# Altium PCB BOARD.PcbDoc
Units mil, origin at the board's own origin, x right, y up, seen from the top; angles counter-clockwise.
Board outline 615 x 1965 mil, 4 copper layers (Component Side, Signal Layer 1, Signal Layer 2, Solder Side), stack 62.2 mil thick; 60 components, 39 nets, 168 pads, 33 vias.
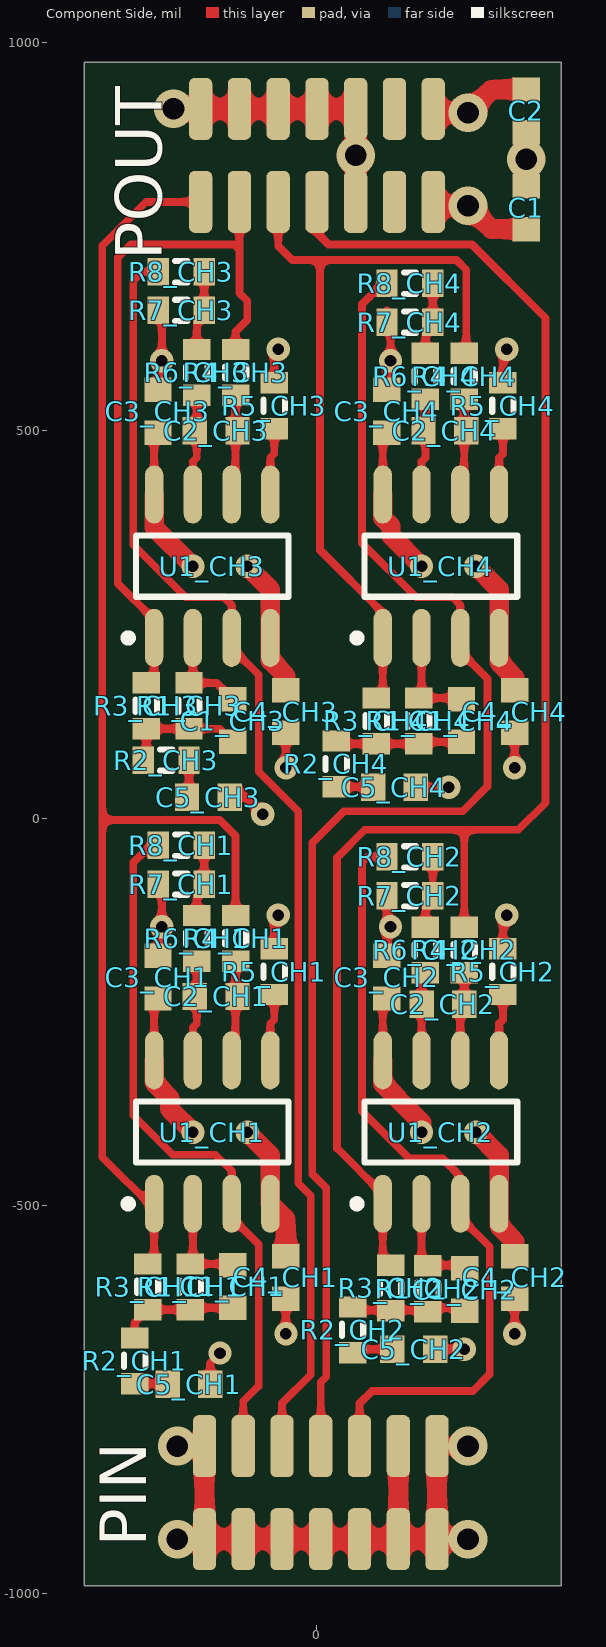
[diagram p0: Component Side view]
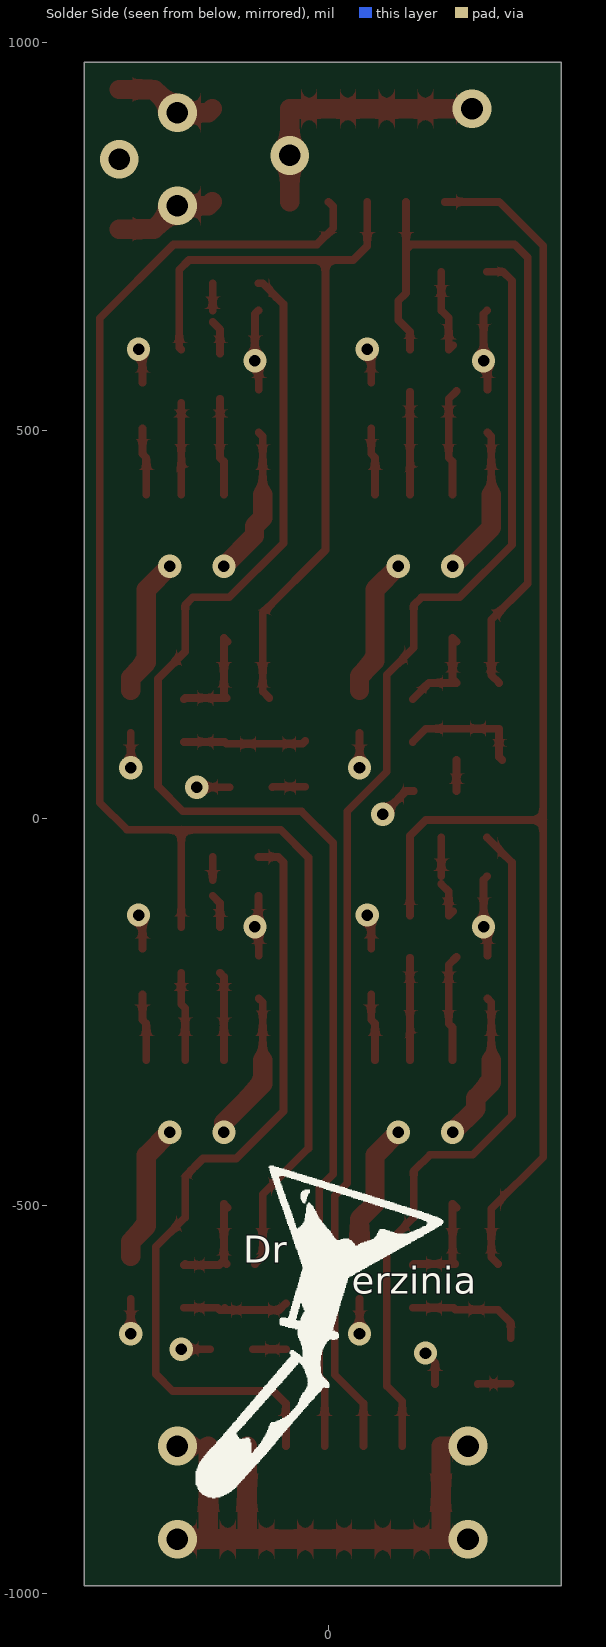
[diagram p1: Solder Side view, seen from below]
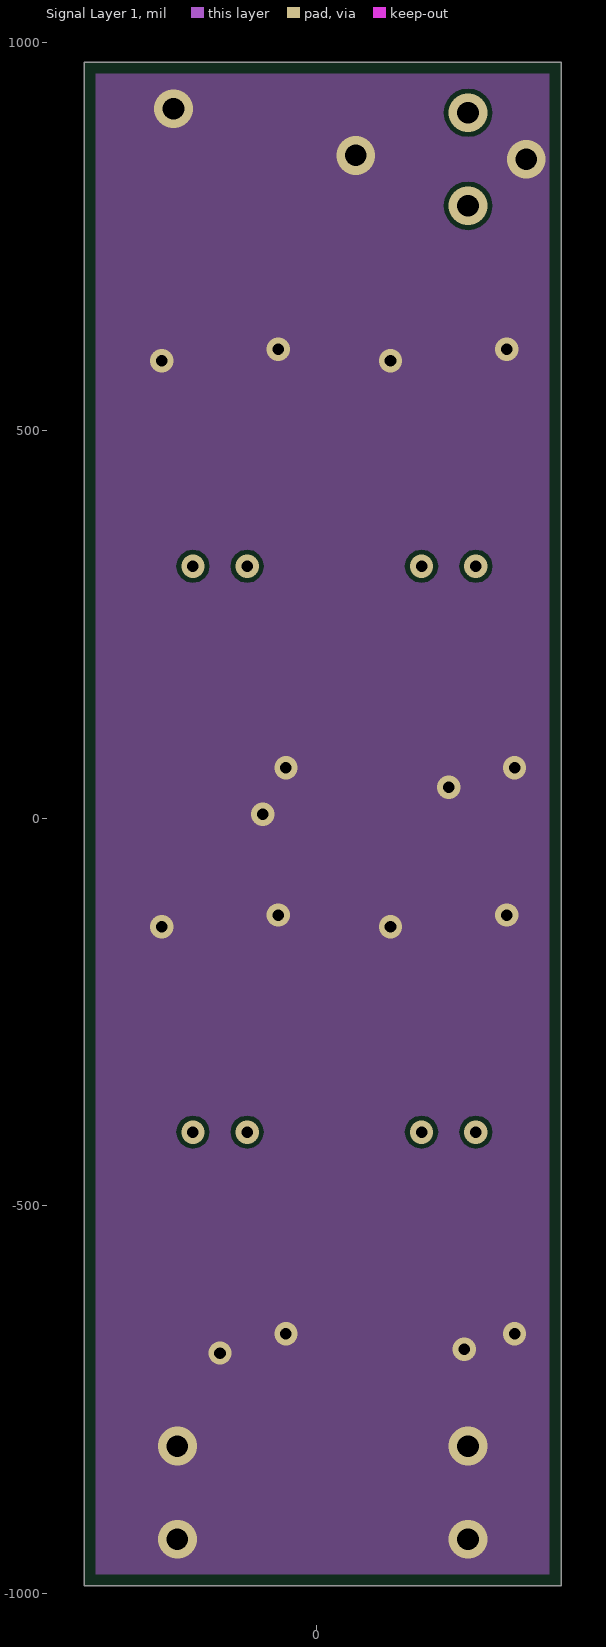
[diagram p2: Signal Layer 1]
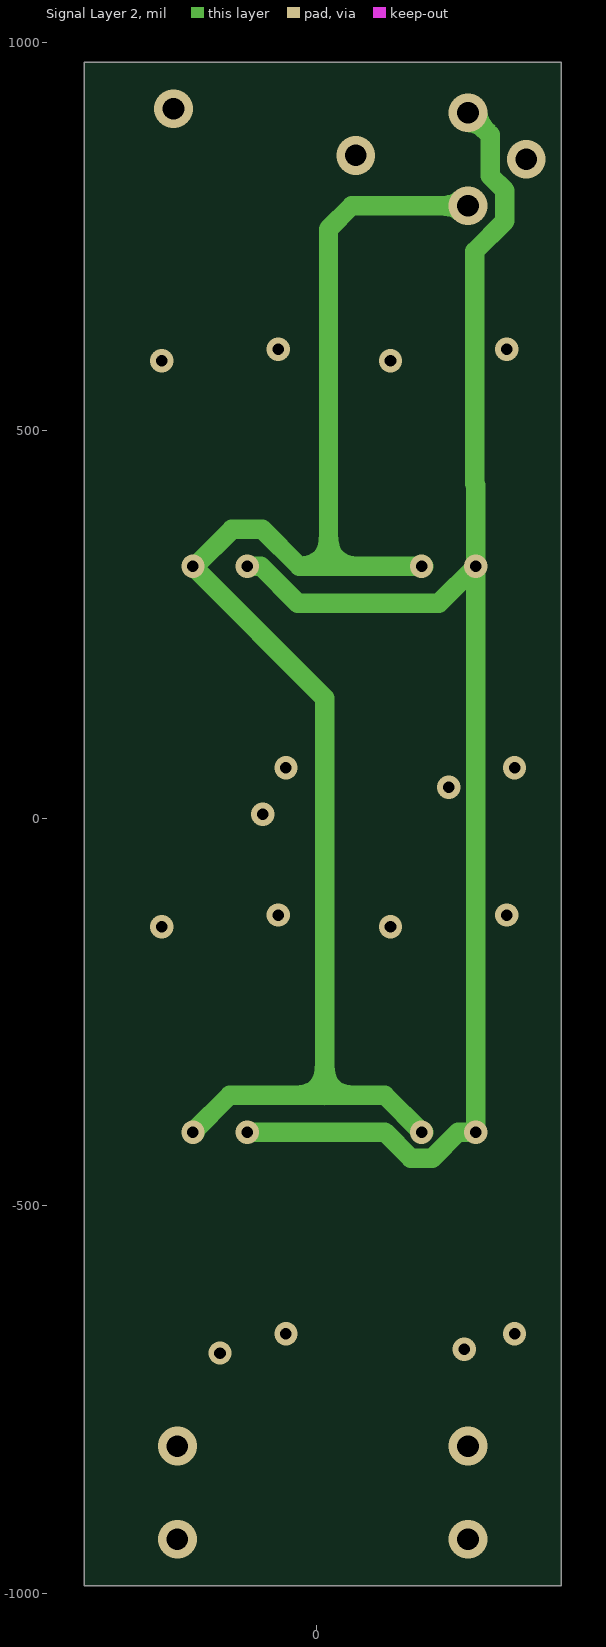
[diagram p3: Signal Layer 2]

## Layer stack, top to bottom
Top Solder: solder mask 0.4, Solder Resist, Dk 3.5
Component Side: signal copper 1.4
Dielectric 1: core 7, FR-4, Dk 4.8
Signal Layer 1: signal copper 0.7
Dielectric 3: prepreg 44, Dk 4.2
Signal Layer 2: signal copper 0.7
Dielectric 4: core 7, Dk 4.2
Solder Side: signal copper 1.4
Bottom Solder: solder mask 0.4, Solder Resist, Dk 3.5

## Board outline
-300,-990 -300,975 315,975 315,-990

## Design rules (kind name [scope] priority, off if disabled: settings)
Clearance [All] p1: gap=6 ignorepadtopadclearanceinfootprint=FALSE except(0: Arc-Hole Track-Hole SMDPad-Hole THPad-Hole Via-Hole Fill-Hole Poly-Hole Region-Hole Text-Hole)
PolygonConnect [All] p1: connectstyle=Direct reliefconductorwidth=10 reliefentries=4 polygonreliefangle="90 Angle" airgapwidth=10
RoutingVias [All] p1: holewidth=28 width=50 viastyle="Through Hole" minholewidth=10 minwidth=20 maxholewidth=28 maxwidth=50
SolderMaskExpansion [All] p1: expansion=4
Width [All] p1: maxlimit=30 minlimit=10 preferedwidth=30 toplayer_prefwidth=10 midlayer1_prefwidth=10 bottomlayer_prefwidth=10 minimp=50.000000 maximp=50.000000 favimp=50.000000
30 further rules are at their usual default settings.

## Classes and differential pairs
channel class CHANNEL: CH1 CH2 CH3 CH4
net class OUT[1..4]: OUT1 OUT2 OUT3 OUT4
net class IN[1..4]: IN1 IN2 IN3 IN4
component class U_CONNECTORS: PIN POUT
component class CH4: C1_CH4 C2_CH4 C3_CH4 C4_CH4 C5_CH4 R1_CH4 R2_CH4 R3_CH4 R4_CH4 R5_CH4 R6_CH4 R7_CH4 R8_CH4 U1_CH4
component class CH3: C1_CH3 C2_CH3 C3_CH3 C4_CH3 C5_CH3 R1_CH3 R2_CH3 R3_CH3 R4_CH3 R5_CH3 R6_CH3 R7_CH3 R8_CH3 U1_CH3
component class CH2: C1_CH2 C2_CH2 C3_CH2 C4_CH2 C5_CH2 R1_CH2 R2_CH2 R3_CH2 R4_CH2 R5_CH2 R6_CH2 R7_CH2 R8_CH2 U1_CH2
component class CH1: C1_CH1 C2_CH1 C3_CH1 C4_CH1 C5_CH1 R1_CH1 R2_CH1 R3_CH1 R4_CH1 R5_CH1 R6_CH1 R7_CH1 R8_CH1 U1_CH1
component class BOARD: C1 C2

## Components (designator, comment, footprint, x,y, rotation, side; value= is the part's Value field where it differs from the comment)
C1 "Cap Semi" 1608[0603] 270,787.44 r270 top value=10uF
C1_CH1 "Cap Semi" 1608[0603] -108.5,-604.06 r90 top value=2000pF (schematic designator C1)
C1_CH2 "Cap Semi" 1608[0603] 191,-608 r90 top value=2000pF (schematic designator C1)
C1_CH3 "Cap Semi" 1608[0603] -108.5,125.94 r90 top value=2000pF (schematic designator C1)
C1_CH4 "Cap Semi" 1608[0603] 186.5,125.94 r90 top value=2000pF (schematic designator C1)
C2 "Cap Semi" 1608[0603] 270,912.44 r90 top value=10uF
C2_CH1 "Cap Semi" 1608[0603] -130,-230 r0 top value=470pF (schematic designator C2)
C2_CH2 "Cap Semi" 1608[0603] 162.56,-240 r0 top value=470pF (schematic designator C2)
C2_CH3 "Cap Semi" 1608[0603] -130,500 r0 top value=470pF (schematic designator C2)
C2_CH4 "Cap Semi" 1608[0603] 165,500 r0 top value=470pF (schematic designator C2)
C3_CH1 "Cap Semi" 1608[0603] -205,-205 r270 top value=100nF (schematic designator C3)
C3_CH2 "Cap Semi" 1608[0603] 90,-205 r270 top value=100nF (schematic designator C3)
C3_CH3 "Cap Semi" 1608[0603] -205,525 r270 top value=100nF (schematic designator C3)
C3_CH4 "Cap Semi" 1608[0603] 90,525 r270 top value=100nF (schematic designator C3)
C4_CH1 "Cap Semi" 1608[0603] -40,-592.44 r90 top value=100nF (schematic designator C4)
C4_CH2 "Cap Semi" 1608[0603] 255,-592.44 r90 top value=100nF (schematic designator C4)
C4_CH3 "Cap Semi" 1608[0603] -40,137.56 r90 top value=100nF (schematic designator C4)
C4_CH4 "Cap Semi" 1608[0603] 255,137.56 r90 top value=100nF (schematic designator C4)
C5_CH1 "Cap Semi" 1608[0603] -165,-730 r180 top value=47nF (schematic designator C5)
C5_CH2 "Cap Semi" 1608[0603] 125,-685 r180 top value=47nF (schematic designator C5)
C5_CH3 "Cap Semi" 1608[0603] -140,27 r180 top value=47nF (schematic designator C5)
C5_CH4 "Cap Semi" 1608[0603] 100,40 r180 top value=47nF (schematic designator C5)
PIN "Header 7X2" CLP-107-02-L-DH-TR 5,-870 r180 top
POUT "Header 7X2" FTSH-107-01-L-DH 0,855 r180 top
R1_CH1 "Res3" J1-0603 -163.5,-604.53 r90 top value=100M (schematic designator R1)
R1_CH2 "Res3" J1-0603 143,-607 r90 top value=100M (schematic designator R1)
R1_CH3 "Res3" J1-0603 -165,145 r90 top value=100M (schematic designator R1)
R1_CH4 "Res3" J1-0603 131.5,125.47 r90 top value=100M (schematic designator R1)
R2_CH1 "Res3" J1-0603 -235,-700 r90 top value=200 (schematic designator R2)
R2_CH2 "Res3" J1-0603 46,-660 r90 top value=200 (schematic designator R2)
R2_CH3 "Res3" J1-0603 -194.53,75 r180 top value=200 (schematic designator R2)
R2_CH4 "Res3" J1-0603 25,70 r90 top value=200 (schematic designator R2)
R3_CH1 "Res3" J1-0603 -218.5,-604.53 r90 top value=82k (schematic designator R3)
R3_CH2 "Res3" J1-0603 95,-606 r90 top value=82k (schematic designator R3)
R3_CH3 "Res3" J1-0603 -220,145 r90 top value=82k (schematic designator R3)
R3_CH4 "Res3" J1-0603 76.5,125.47 r90 top value=82k (schematic designator R3)
R4_CH1 "Res3" J1-0603 -105,-155 r90 top value=1M (schematic designator R4)
R4_CH2 "Res3" J1-0603 190,-170 r90 top value=1M (schematic designator R4)
R4_CH3 "Res3" J1-0603 -105,575 r90 top value=1M (schematic designator R4)
R4_CH4 "Res3" J1-0603 190,570 r90 top value=1M (schematic designator R4)
R5_CH1 "Res3" J1-0603 -55,-197.91 r90 top value=1M (schematic designator R5)
R5_CH2 "Res3" J1-0603 240,-197.91 r90 top value=1M (schematic designator R5)
R5_CH3 "Res3" J1-0603 -55,532.09 r90 top value=1M (schematic designator R5)
R5_CH4 "Res3" J1-0603 240,532.09 r90 top value=1M (schematic designator R5)
R6_CH1 "Res3" J1-0603 -155,-155 r270 top value=100k (schematic designator R6)
R6_CH2 "Res3" J1-0603 140,-170 r270 top value=100k (schematic designator R6)
R6_CH3 "Res3" J1-0603 -155,575 r270 top value=100k (schematic designator R6)
R6_CH4 "Res3" J1-0603 140,570 r270 top value=100k (schematic designator R6)
R7_CH1 "Res3" J1-0603 -175,-85 r0 top value=1M (schematic designator R7)
R7_CH2 "Res3" J1-0603 120,-100 r0 top value=1M (schematic designator R7)
R7_CH3 "Res3" J1-0603 -175,655 r0 top value=1M (schematic designator R7)
R7_CH4 "Res3" J1-0603 120,640 r0 top value=1M (schematic designator R7)
R8_CH1 "Res3" J1-0603 -175,-35 r180 top value=100M (schematic designator R8)
R8_CH2 "Res3" J1-0603 120,-50 r180 top value=100M (schematic designator R8)
R8_CH3 "Res3" J1-0603 -175,705 r180 top value=100M (schematic designator R8)
R8_CH4 "Res3" J1-0603 120,690 r180 top value=100M (schematic designator R8)
U1_CH1 "LT1113" SO8_L -135,-404.92 r90 top (schematic designator U1)
U1_CH2 "LT1113" SO8_L 160,-404.92 r90 top (schematic designator U1)
U1_CH3 "LT1113" SO8_L -135,325.08 r90 top (schematic designator U1)
U1_CH4 "LT1113" SO8_L 160,325.08 r90 top (schematic designator U1)

## Footprints (in the part's own frame and the unit in brackets; to place one, negate y for a bottom-side part, rotate by r counter-clockwise, add the part's x,y. Pads: shape width x height; smd on the part's side, far side on the other; paste and mask are expansions set on the pad)
1608[0603] [mm] "Chip Capacitor, Body 1.6x0.8mm, IPC High Density"
  rect 0.8x0.9 smd: 1(-0.7,0) 2(0.7,0)
  body extent -0.87,-0.48 0.87,0.48, height 1.3
CLP-107-02-L-DH-TR [mil]
  rrect50% 30x80 smd: 1(150,60) 2(150,-60) 3(100,60) 4(100,-60) 5(50,60) 6(50,-60) 7(0,60) 8(0,-60) 9(-50,60) 10(-50,-60) 11(-100,60) 12(-100,-60) 13(-150,60) 14(-150,-60)
  body extent -184,-90 184,90, height 136
FTSH-107-01-L-DH [mil]
  rrect50% 30x80 smd: 1(150,60) 2(150,-60) 3(100,60) 4(100,-60) 5(50,60) 6(50,-60) 7(0,60) 8(0,-60) 9(-50,60) 10(-50,-60) 11(-100,60) 12(-100,-60) 13(-150,60) 14(-150,-60)
  body extent -175,-344 175,85, height 132
J1-0603 [mm] "Chip Resistor, Body 1.6x0.8mm, IPC High Density"
  rect 0.7x0.9 smd: 1(-0.75,0) 2(0.75,0)
  silkscreen extent -0.2,-0.35 0.2,0.35, body extent -0.85,-0.48 0.85,0.48, height 0.9
SO8_L [mm] "SOIC, 8-Leads, Body 4.9x3.9mm, Pitch 1.27mm, IPC High Density"
  oval 1.9x0.6 smd: 1(-2.35,1.905) 2(-2.35,0.635) 3(-2.35,-0.635) 4(-2.35,-1.905) 5(2.35,-1.905) 6(2.35,-0.635) 7(2.35,0.635) 8(2.35,1.905)
  silkscreen extent -2.47,-2.5 1,2.88, body extent -2,-2.5 2,2.5, height 1.75

## Part data
C1 C1_CH1 C1_CH2 C1_CH3 C1_CH4 C2 C2_CH1 C2_CH2 C2_CH3 C2_CH4 C3_CH1 C3_CH2 C3_CH3 C3_CH4 C4_CH1 C4_CH2 C4_CH3 C4_CH4 C5_CH1 C5_CH2 C5_CH3 C5_CH4: "Capacitor (Semiconductor SIM Model)", LatestRevisionDate=29-May-2009, LatestRevisionNote="IPC-7351 Footprint Added.", PackageDescription="Chip Capacitor", PackageReference=C1206, Published=8-Jun-2000, Publisher="Altium Limited"
PIN POUT: "Header, 7-Pin, Dual row", LatestRevisionDate=17-Jul-2002, LatestRevisionNote="Re-released for DXP Platform.", Publisher="Altium Limited", System=Connector
R1_CH1 R1_CH2 R1_CH3 R1_CH4 R2_CH1 R2_CH2 R2_CH3 R2_CH4 R3_CH1 R3_CH2 R3_CH3 R3_CH4 R4_CH1 R4_CH2 R4_CH3 R4_CH4 R5_CH1 R5_CH2 R5_CH3 R5_CH4 R6_CH1 R6_CH2 R6_CH3 R6_CH4 R7_CH1 R7_CH2 R7_CH3 R7_CH4 R8_CH1 R8_CH2 R8_CH3 R8_CH4: "Resistor", LatestRevisionDate=29-May-2009, LatestRevisionNote="IPC-7351 Footprint Added.", PackageDescription="Chip Resistor", PackageReference=J1-0603, Published=8-Jun-2000, Publisher="Altium Limited"
U1_CH1 U1_CH2 U1_CH3 U1_CH4: "LT1113 Opamp"

## Via types
v1: diameter 30, hole 15, Component Side to Solder Side, 24 vias
v2: diameter 50, hole 28, Component Side to Solder Side, 9 vias

## Nets (pads, with @x,y where several pads share a name; then routed paths per layer and width w, separated by ;. In a path a pad name is that pad's centre, name@x,y a point inside that pad or via, vN(x,y) a via of type N, cw(c..) or ccw(c..) an arc to the next point about the centre after c; other vN are vias at no path point)
5V: C1.2 C3_CH1.2 C3_CH2.2 C3_CH3.2 C3_CH4.2 POUT.13 U1_CH1.8 U1_CH2.8 U1_CH3.8 U1_CH4.8 | length 2995.1
  Component Side w10: U1_CH1.8 -210,-237.56 C3_CH1.2 ; U1_CH3.8 -210,492.44 C3_CH3.2 ; v1(-160,-405) v1@-160,-397.62 ; v1(-160,325) v1@-160,332.38 ; U1_CH2.8 85,-237.56 C3_CH2.2 ; U1_CH4.8 85,492.44 C3_CH4.2 ; v1(135,-405) v1@135,-397.62 ; v1(135,325) v1@135,332.38
  Component Side w25: U1_CH1.8 -210,-341 -190,-361 -190,-375 v1(-160,-405) ; U1_CH3.8 -210,375 v1(-160,325) ; U1_CH2.8 85,-342.67 135,-392.67 v1@135,-397.62 ; U1_CH4.8 85,387.33 95.5,376.83 95.5,364.5 v1(135,325) ; POUT.13 155,790 v2(195,790) 225.12,759.88 C1.2
  Signal Layer 2 w25: v1@-157.18,-405 v1(-160,-405) -112.5,-357.5 10,-357.5 ; v1@137.82,-405 v1(135,-405) 87.5,-357.5 10,-357.5 ; v1@137.82,325 v1(135,325) 15,325 ; v2(195,790) 45,790 15,760 15,325 ; 10,-357.5 10,155 v1(-160,325) -157.18,325 -109.68,372.5 -70.32,372.5 -22.82,325 15,325
-5V: C2.2 C4_CH1.2 C4_CH2.2 C4_CH3.2 C4_CH4.2 POUT.14 U1_CH1.4 U1_CH2.4 U1_CH3.4 U1_CH4.4 | length 2865.3
  Component Side w25: v1(-90,-405) -60,-435 U1_CH1.4 -40,-517.44 C4_CH1.2 ; v1(-90,325) -60,295 U1_CH3.4 -60,203.23 -40,183.23 C4_CH3.2 ; POUT.14 155,910 v2(195,910) 225,940 C2.2 ; v1(205,-405) 235,-435 U1_CH2.4 235,-526 255,-546 C4_CH2.2 ; v1(205,325) 235,295 U1_CH4.4 235,201 255,181 C4_CH4.2
  Signal Layer 2 w25: v1(-90,-405) 87.62,-405 121.12,-438.5 148.88,-438.5 182.38,-405 v1(205,-405) v1(205,325) ; v1(-90,325) -72.32,325 -24.82,277.5 157.5,277.5 v1(205,325) ; v2(195,910) 223.59,881.41 223.59,828.59 242.5,809.68 242.5,770.32 203.59,731.41 203.59,431.09 205,429.68 v1(205,325)
GND: C1.1 C2.1 C3_CH1.1 C3_CH2.1 C3_CH3.1 C3_CH4.1 C4_CH1.1 C4_CH2.1 C4_CH3.1 C4_CH4.1 C5_CH1.1 C5_CH2.1 C5_CH3.1 C5_CH4.1 PIN.1 PIN.2 PIN.3 PIN.5 PIN.7 PIN.9 PIN.11 PIN.12 PIN.13 PIN.14 POUT.2 POUT.4 POUT.6 POUT.8 POUT.9 POUT.10 R5_CH1.2 R5_CH2.2 R5_CH3.2 R5_CH4.2 R7_CH1.1 R7_CH2.1 R7_CH3.1 R7_CH4.1 | length 2104.7
  Component Side w10: C3_CH1.1 -205,-145 v1(-200,-140) -200,-79.53 R7_CH1.1@-204.53,-75 ; C3_CH3.1 -205,585 v1(-200,590) -200,650.47 R7_CH3.1 ; C5_CH1.1 -137.44,-702.44 v1(-125,-690) ; C5_CH3.1@-109.88,35 -100,35 v1(-70,5) ; R5_CH1.2 -55,-130 v1(-50,-125) ; R5_CH3.2 -55,600 v1(-50,605) ; v1(-40,-665) C4_CH1.1 ; v1(-40,65) C4_CH3.1 ; C3_CH2.1 90,-145 v1(95,-140) 90.47,-135.47 R7_CH2.1 ; C3_CH4.1 90,585 v1(95,590) 95,650.47 R7_CH4.1@90.47,655 ; C5_CH4.1 v1(170,40) ; C5_CH2.1 v1(190,-685) ; PIN.14 v2(195,-810) ; R5_CH2.2 240,-130 v1(245,-125) ; R5_CH4.2 240,600 v1(245,605) ; v1(255,-665) C4_CH2.1 ; v1(255,65) C4_CH4.1
  Component Side w25: v2(-185,915) POUT.2 POUT.4 POUT.6 POUT.8 POUT.10 v2(50,855) POUT.9 ; v2(-180,-930) PIN.1 ; v2(-180,-810) PIN.2 PIN.1 ; PIN.12 PIN.11 ; PIN.14 PIN.13 ; v2(195,-930) PIN.13 ; PIN.1 PIN.3 PIN.5 PIN.7 PIN.9 PIN.11 ; PIN.11 PIN.13
  other v2: 270,850
IN1: PIN.4 R8_CH1.2 U1_CH1.3 | length 906.1
  Component Side w10: R8_CH1.2@-204.53,-25 -236.53,-57 -236.81,-57 -236.81,-383.19 -186,-434 -131,-434 -110,-455 -110,-515 -75,-550 -75,-732.32 -95,-752.32 PIN.4
IN2: PIN.10 R8_CH2.2 U1_CH2.3 | length 1027.5
  Component Side w10: PIN.10 55,-755 71,-739 201,-739 223,-717 223,-553 185,-515 185,-462 162,-439 119,-439 58.19,-378.19 58.19,-56.81 65,-50 R8_CH2.2
IN3: PIN.6 R8_CH3.2 U1_CH3.3 | length 1679.2
  Component Side w10: R8_CH3.2 -225,705 -236.81,693.19 -236.81,352.81 -169,285 -120,285 -110,275 -110,220 -75,185 -75,60 -24,9 -24,-471 -8,-487 -8,-717.85 -45,-754.85 PIN.6
IN4: PIN.8 R8_CH4.2 U1_CH4.3 | length 1804.7
  Component Side w10: PIN.8 5,-727.48 12,-720.48 12,-477 -6,-459 -6,-32 35,9 188,9 220,41 220,180 185,215 U1_CH4.3 185,275 175,285 128,285 58.19,354.81 58.19,663.19 85,690 R8_CH4.2
NetC1_CH1_1: C1_CH1.1 R1_CH1.1 R2_CH1.2 R3_CH1.1 | length 154.3
  Component Side w10: R2_CH1.2 -235,-650.55 R3_CH1.1 R1_CH1.1 -161.06,-631.61 C1_CH1.1
NetC1_CH1_2: C1_CH1.2 R1_CH1.2 U1_CH1.2 | length 141.7
  Component Side w10: U1_CH1.2@-165,-502.44 U1_CH1.2 -160,-571.5 R1_CH1.2 -110,-575 C1_CH1.2
NetC1_CH2_1: C1_CH2.1 R1_CH2.1 R2_CH2.2 R3_CH2.1 | length 139.7
  Component Side w10: R2_CH2.2@55,-625.94 63.58,-634.53 95,-634.53 140,-634.53 142.91,-631.61 C1_CH2.1@186.5,-631.61 ; R1_CH2.1@131.5,-634.06 R1_CH2.1@133.94,-631.61
NetC1_CH2_2: C1_CH2.2 R1_CH2.2 U1_CH2.2 | length 141.2
  Component Side w10: U1_CH2.2@130,-502.44 U1_CH2.2 135,-570.47 140,-575.47 141.02,-576.5 186.5,-576.5 C1_CH2.2@185,-575 ; R1_CH2.2@131.5,-575 R1_CH2.2@135,-571.5
NetC1_CH3_1: C1_CH3.1 R1_CH3.1 R2_CH3.2 R3_CH3.1 | length 160.7
  Component Side w10: R2_CH3.2 -220,79.05 R3_CH3.1 R1_CH3.1 -125.59,115.47 C1_CH3.1
NetC1_CH3_2: C1_CH3.2 R1_CH3.2 U1_CH3.2 | length 132.4
  Component Side w10: U1_CH3.2@-165,227.56 U1_CH3.2 -160,179.53 R1_CH3.2 -129.53,174.53 C1_CH3.2
NetC1_CH4_1: C1_CH4.1 R1_CH4.1 R2_CH4.2 R3_CH4.1 | length 159
  Component Side w10: R2_CH4.2@30,99.53 33.58,95.94 R3_CH4.1 R1_CH4.1 133.94,98.39 C1_CH4.1
NetC1_CH4_2: C1_CH4.2 R1_CH4.2 U1_CH4.2 | length 141.7
  Component Side w10: U1_CH4.2@130,227.56 U1_CH4.2 135,158.5 R1_CH4.2 185,155 C1_CH4.2
NetC2_CH1_1: C2_CH1.1 R6_CH1.2 U1_CH1.7 | length 139.6
  Component Side w10: R6_CH1.2@-165,-179.06 -155,-189.06 -155,-265 -160,-270 U1_CH1.7
NetC2_CH1_2: C2_CH1.2 R4_CH1.1 U1_CH1.6 | length 132.4
  Component Side w10: U1_CH1.6@-105,-312.4 R4_CH1.1@-105,-180
NetC2_CH2_1: C2_CH2.1 R6_CH2.2 U1_CH2.7 | length 114.9
  Component Side w10: U1_CH2.7 C2_CH2.1 135,-204.53 R6_CH2.2
NetC2_CH2_2: C2_CH2.2 R4_CH2.1 U1_CH2.6 | length 115
  Component Side w10: U1_CH2.6 185,-245.12 C2_CH2.2 190.12,-199.65 R4_CH2.1
NetC2_CH3_1: C2_CH3.1 R6_CH3.2 U1_CH3.7 | length 139.6
  Component Side w10: R6_CH3.2@-165,550.94 -155,540.94 -155,465 -160,460 U1_CH3.7
NetC2_CH3_2: C2_CH3.2 R4_CH3.1 U1_CH3.6 | length 132.4
  Component Side w10: U1_CH3.6@-105,417.6 R4_CH3.1@-105,550
NetC2_CH4_1: C2_CH4.1 R6_CH4.2 U1_CH4.7 | length 125.4
  Component Side w10: U1_CH4.7 135,460 140,465 R6_CH4.2@140,540.94
NetC2_CH4_2: C2_CH4.2 R4_CH4.1 U1_CH4.6 | length 117.9
  Component Side w10: U1_CH4.6@190,417.6 R4_CH4.1@190,535.47
NetC5_CH1_2: C5_CH1.2 R2_CH1.1 | length 42.6
  Component Side w10: R2_CH1.1 -193.03,-729.53 C5_CH1.2
NetC5_CH2_2: C5_CH2.2 R2_CH2.1 | length 42.4
  Component Side w10: R2_CH2.1@55,-685 C5_CH2.2
NetC5_CH3_2: C5_CH3.2 R2_CH3.1 | length 40
  Component Side w10: C5_CH3.2@-165,35 R2_CH3.1
NetC5_CH4_2: C5_CH4.2 R2_CH4.1 | length 42.6
  Component Side w10: R2_CH4.1@30,40.47 71.97,40.47 C5_CH4.2
NetR5_CH1_1: R5_CH1.1 U1_CH1.5 | length 87
  Component Side w10: U1_CH1.5 -60,-265 -55,-260 R5_CH1.1
NetR5_CH2_1: R5_CH2.1 U1_CH2.5 | length 87
  Component Side w10: U1_CH2.5 235,-265 240,-260 R5_CH2.1
NetR5_CH3_1: R5_CH3.1 U1_CH3.5 | length 87
  Component Side w10: U1_CH3.5 -60,465 -55,470 R5_CH3.1
NetR5_CH4_1: R5_CH4.1 U1_CH4.5 | length 87
  Component Side w10: U1_CH4.5 235,465 240,470 R5_CH4.1
NetR6_CH1_1: R6_CH1.1 R7_CH1.2 R8_CH1.1 | length 101.5
  Component Side w10: R6_CH1.1@-160.47,-120 R6_CH1.1@-155.47,-125 ; R6_CH1.1 -155,-94.53 R7_CH1.2 ; R7_CH1.2@-145.47,-75 R8_CH1.1 R8_CH1.1@-145.47,-25
NetR6_CH2_1: R6_CH2.1 R7_CH2.2 R8_CH2.1 | length 74.4
  Component Side w10: R6_CH2.1 140,-109.53 R7_CH2.2 ; 149.53,-80 R8_CH2.1
NetR6_CH3_1: R6_CH3.1 R7_CH3.2 R8_CH3.1 | length 111.5
  Component Side w10: R6_CH3.1@-160.47,610 R6_CH3.1@-155.47,605 ; R6_CH3.1 -155,645.47 R7_CH3.2 R8_CH3.1
NetR6_CH4_1: R6_CH4.1 R7_CH4.2 R8_CH4.1 | length 79.4
  Component Side w10: R6_CH4.1 140,630.47 R7_CH4.2 ; R7_CH4.2@149.53,655 R8_CH4.1
OUT1: POUT.1 R3_CH1.2 R4_CH1.2 U1_CH1.1 | length 1777.9
  Component Side w10: -277,-2.28 -276.81,-2.28 ; R3_CH1.2 -210,-566.5 -210,-504 -276.81,-437.19 -276.81,-2.28 ; POUT.1 -220,795 -276.81,738.19 -276.81,-2.28 ; R4_CH1.2 -105,-22.76 -125.48,-2.28 -276.81,-2.28
OUT2: POUT.7 R3_CH2.2 R4_CH2.2 U1_CH2.1 | length 1987.5
  Component Side w10: POUT.7 -6,789 -6,761 15,740 200,740 295,645 295,20.15 259.85,-15 190,-15 ; R3_CH2.2@95,-575.47 85,-565.47 U1_CH2.1 85,-485 26,-426 26,-50.72 61.72,-15 190,-15 ; R4_CH2.2 190,-15
OUT3: POUT.3 R3_CH3.2 R4_CH3.2 U1_CH3.1 | length 939.5
  Component Side w10: R3_CH3.2 -210,184.53 U1_CH3.1 -210,256 -256.81,302.81 -256.81,723.19 -240,740 -106.57,740 -100,733.43 ; R4_CH3.2 -105,627.57 -90,642.57 -90,667.43 -100,677.43 -100,733.43 ; POUT.3 -100,733.43
OUT4: POUT.5 R3_CH4.2 R4_CH4.2 U1_CH4.1 | length 1018.1
  Component Side w10: POUT.5 -50,738.14 -31.86,720 4,720 ; R3_CH4.2 85,163.5 U1_CH4.1 85,265 4,346 4,720 ; R4_CH4.2@190,604.53 192.5,607.03 192.5,707.5 180,720 4,720
pads on no net: POUT.11 POUT.12

## Polygon pours and split planes (outlines as drawn)
GND on Signal Layer 1 "GNDPlane" (solid, remove dead copper, pour order 0): -285,-975 -285,960 300,960 300,-975

## Silkscreen, mask and mechanical layers (free items; w line width, h text height)
Bottom Overlay:
  drawing of 735 lines, arcs and shapes, not listed
  text "Dr" at 110,-585 h60
  text "erzinia" at -30,-625 h60
Mechanical 1:
  the board outline again, w10